# Altium PCB PCB_esp32-current-monitor_2025-10-18.pcbdoc
Units mil, origin at the board's own origin, x right, y up, seen from the top; angles counter-clockwise.
Board outline 3844.64 x 2973.32 mil, 2 copper layers (Top Layer, Bottom Layer); 25 components, 13 nets, 97 pads, 6 vias.
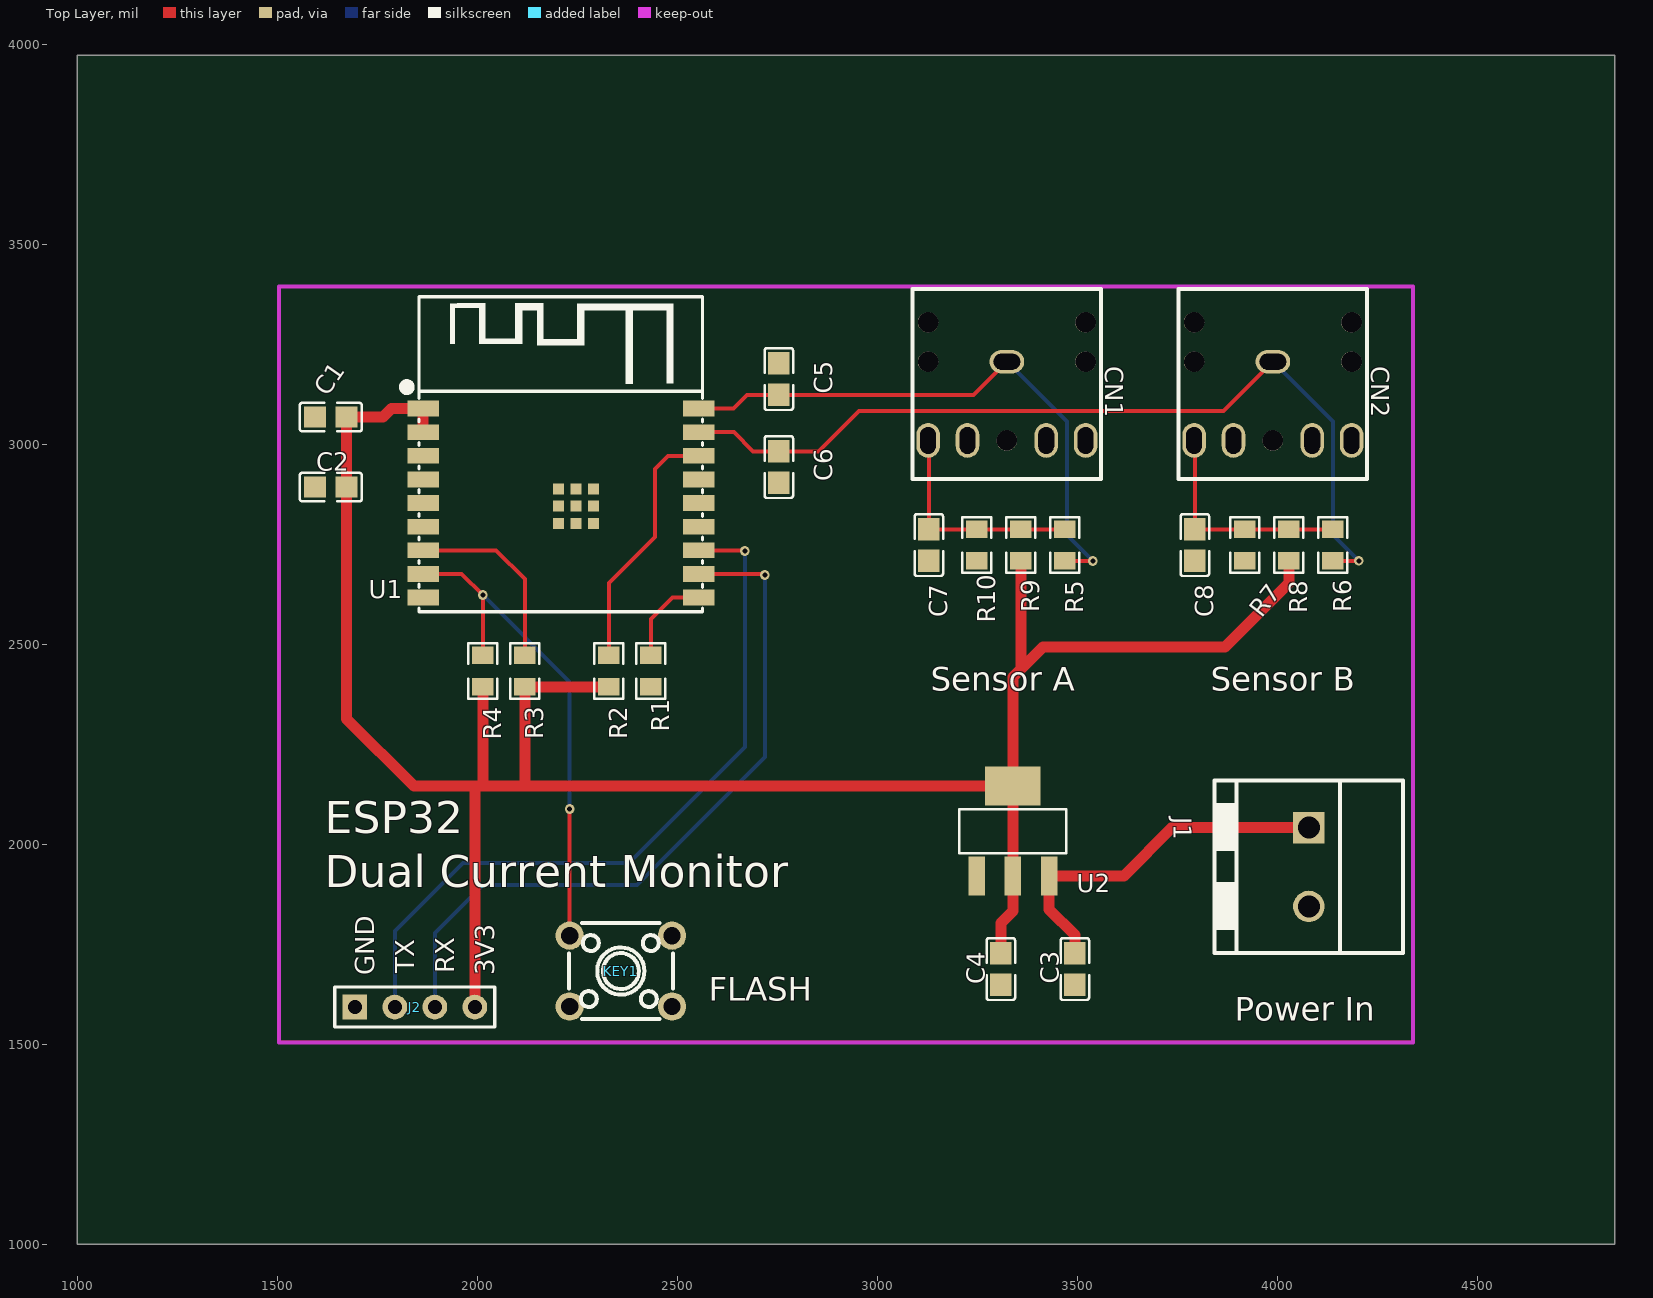
[diagram p0: Top Layer view]
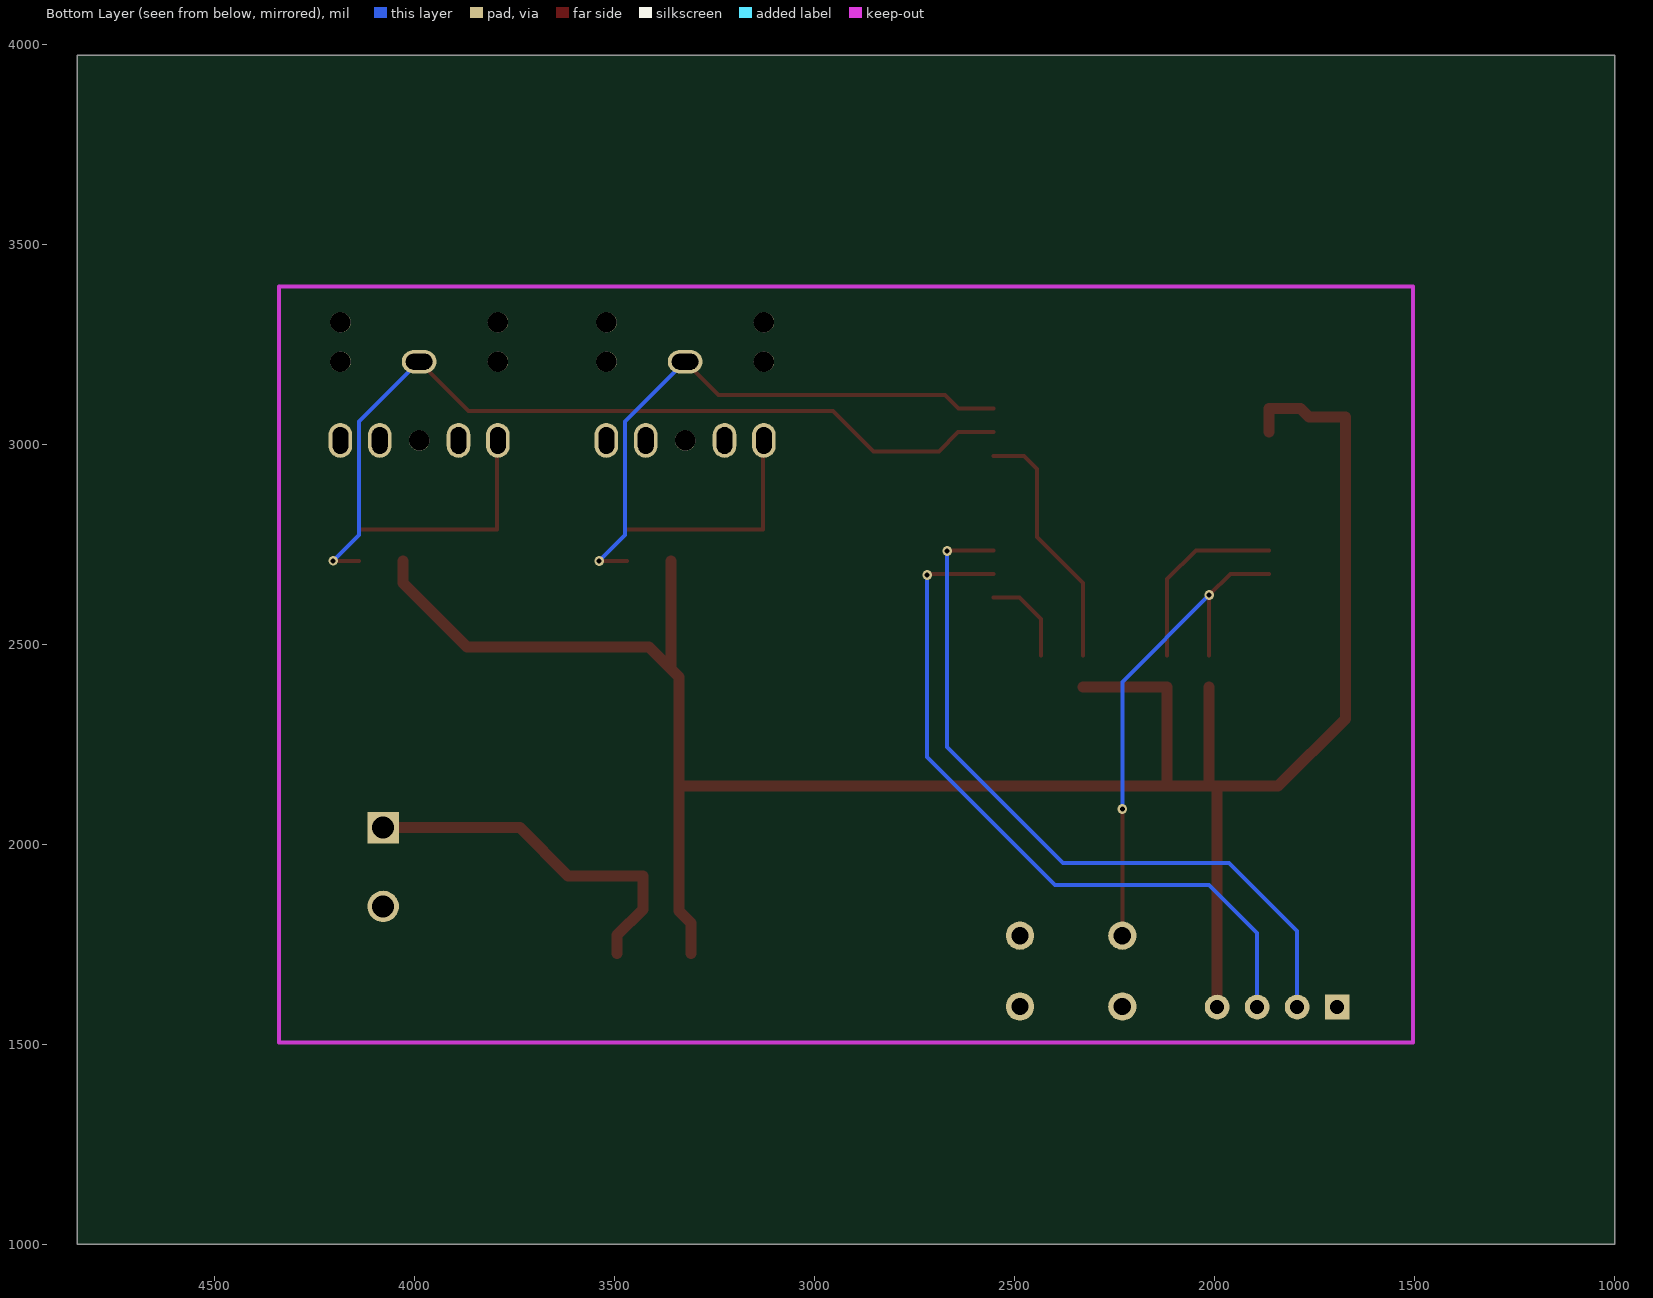
[diagram p1: Bottom Layer view, seen from below]

## Layer stack, top to bottom
Top Layer: signal copper (thickness not stored)
Dielectric: dielectric 12.6, FR-4, Dk 4.8
Bottom Layer: signal copper (thickness not stored)

## Board outline
4844.64,1000 1000,1000 1000,3973.32 4844.64,3973.32

## Components (designator, comment, footprint, x,y, rotation, side; value= is the part's Value field where it differs from the comment)
C1 "0.1u" C0805 1634.41,3068.31 r0 top
C2 "10u" C0805 1634.41,2893.31 r0 top
C3 "10u" C0805 3494.41,1688.31 r90 top
C4 "10u" C0805 3309.41,1688.31 r90 top
C5 "100n" C0805 2754.41,3163.31 r270 top
C6 "100n" C0805 2754.41,2943.31 r90 top
C7 "10u" C0805 3129.41,2748.31 r90 top
C8 "10u" C0805 3794.41,2748.31 r90 top
CN1 "PJ-307G5" AUDIO-TH_PJ-307G5 3324.41,3108.31 r270 top
CN2 "PJ-307G5" AUDIO-TH_PJ-307G5 3989.41,3108.31 r270 top
J1 "KF127S-5.0-2P" CONN-TH_2P-P5.00_KEFA_KF127S-5.0-2P 4079.41,1943.31 r270 top
J2 "HDR-M-2.54_1x4" HDR-M-2.54_1X4 1844.41,1593.31 r0 top
KEY1 "K4-6×6_TH" KEY-TH_4P-L6.0-W6.0-P4.50-LS6.5 2359.41,1683.31 r0 top
R1 "10k" R0805 2434.41,2433.31 r90 top
R2 "10k" R0805 2329.41,2433.31 r270 top
R3 "10k" R0805 2119.41,2433.31 r270 top
R4 "10k" R0805 2014.41,2433.31 r270 top
R5 "1k" R0805 3469.41,2748.31 r270 top
R6 "1k" R0805 4139.41,2748.31 r270 top
R7 "10k" R0805 3919.41,2748.31 r90 top
R8 "10k" R0805 4029.41,2748.31 r270 top
R9 "10k" R0805 3359.41,2748.31 r270 top
R10 "10k" R0805 3249.41,2748.31 r90 top
U1 "ESP32-C3-WROOM-02-H4" WIFIM-SMD_18P-L20.0-W18.0-P1.50 2209.41,2853.31 r0 top
U2 "AMS1117-3.3/TR" SOT-223_L6.5-W3.5-P2.30-LS7.0-BR 3339.41,2033.31 r270 top

## Footprints (in the part's own frame and the unit in brackets; to place one, negate y for a bottom-side part, rotate by r counter-clockwise, add the part's x,y. Pads: shape width x height; smd on the part's side, far side on the other; paste and mask are expansions set on the pad)
AUDIO-TH_PJ-307G5 [mm]
  oval 1.5x2.2 hole 1 slot 1.7 at 90 deg paste+0 mask+0.051: 1(-2.5,0)
  oval 2.2x1.5 hole 1 slot 1.7 at 0 deg paste+0 mask+0.051: 2(2.5,-5) 3(2.5,5) 4(2.5,-2.5) 5(2.5,2.5)
  round 1.3 hole 1.3 unplated paste+0: ""(-5,5) ""(-5,-5) ""(-2.5,5) ""(-2.5,-5) ""(2.5,0)
  silkscreen extent -7.11,-5.99 4.95,5.99
C0805 [mm]
  rect 1.41x1.35 smd paste-100 mask+0.051: 1(-1,0) 2(1,0)
  silkscreen extent -1.96,-0.9 1.96,0.9
CONN-TH_2P-P5.00_KEFA_KF127S-5.0-2P [mm]
  rect 2x2 hole 1.4 paste+0 mask+0.05: 1(-2.5,0)
  round 2 hole 1.4 paste+0 mask+0.05: 2(2.5,0)
  silkscreen extent -5.5,-6 5.46,5.97
HDR-M-2.54_1X4 [mil]
  rect 62x62 hole 35 paste+0 mask+2: 1(-150,0)
  round 62 hole 35 paste+0 mask+2: 2(-50,0) 3(50,0) 4(150,0)
  silkscreen extent -200,-50 200,50
KEY-TH_4P-L6.0-W6.0-P4.50-LS6.5 [mm]
  round 1.8 hole 1.1 paste+0 mask+0.051: 1(-3.251,-2.25) 2(3.251,-2.25) 3(3.251,2.25) 4(-3.251,2.25)
  silkscreen extent -3.3,-3.05 3.3,3.05
R0805 [mil]
  rect 44.59x54.21 smd paste-3937.01 mask+2: 1(-39.37,0) 2(39.37,0)
  silkscreen extent -69,-36 69,36
SOT-223_L6.5-W3.5-P2.30-LS7.0-BR [mm]
  rect 2.465x1.05 smd paste+0 mask+0.051: 1(2.858,-2.3) 2(2.857,0) 3(2.857,2.3)
  rect 2.465x3.54 smd paste+0 mask+0.051: 4(-2.857,0)
  silkscreen extent -1.4,-3.4 1.4,3.4
WIFIM-SMD_18P-L20.0-W18.0-P1.50 [mm]
  rect 2x1 smd paste+0 mask+0.05: 1(-8.75,6) 2(-8.75,4.5) 3(-8.75,3) 4(-8.75,1.5) 5(-8.75,0) 6(-8.75,-1.5) 7(-8.75,-3) 8(-8.75,-4.5) 9(-8.75,-6) 10(8.75,-6) 11(8.75,-4.5) 12(8.75,-3) 13(8.75,-1.5) 14(8.75,0) 15(8.75,1.5) 16(8.75,3) 17(8.75,4.5) 18(8.75,6)
  rect 0.7x0.7 smd paste+0 mask+0.05: 19(-0.14,-1.3) 19(-0.14,-0.2) 19(-0.14,0.9) 19(0.96,-1.3) 19(0.96,-0.2) 19(0.96,0.9) 19(2.06,-1.3) 19(2.06,-0.2) 19(2.06,0.9)
  silkscreen extent -10.03,-6.9 9,13.1

## Via types
v1: diameter 24.41, hole 12.2, Top Layer to Bottom Layer, tented both sides, 6 vias

## Nets (pads, with @x,y where several pads share a name; then routed paths per layer and width w, separated by ;. In a path a pad name is that pad's centre, name@x,y a point inside that pad or via, vN(x,y) a via of type N, cw(c..) or ccw(c..) an arc to the next point about the centre after c; other vN are vias at no path point)
+5V: C3.2 J1.1 U2.3 | length 919.4
  Top Layer w27.56: C3.2 3494.41,1773.31 3429.96,1837.76 U2.3 3616.91,1920.81 3737.84,2041.73 J1.1
CN1_2: C7.2 CN1.2 R5.1 R9.1 R10.2 | length 563
  Top Layer w10: CN1.2 3129.41,3008.03 C7.2 R10.2 R9.1 R5.1
CN2_2: C8.2 CN2.2 R6.1 R7.2 R8.1 | length 568
  Top Layer w10: CN2.2 3794.41,3008.03 C8.2 R7.2 R8.1 R6.1
GND: C1.1 C2.1 C3.1 C4.1 C5.1 C6.1 C7.1 C8.1 J1.2 J2.1 KEY1.3 R1.1 R7.1 R10.1 U1.9 U1.19 U2.1
SENS1_L: C5.2 CN1.1 R5.2 U1.18 | length 1476.5
  Top Layer w10: U1.18 2640.63,3089.53 2675.04,3123.94 C5.2 3241.61,3123.94 CN1.1 ; R5.2 v1(3539.41,2708.31)
  Bottom Layer w10: CN1.1 3474.41,3056.74 3474.41,2773.31 v1(3539.41,2708.31)
SENS2_L: C6.2 CN2.1 R6.2 U1.17 | length 2200
  Top Layer w10: U1.17 2642.24,3030.48 2690.04,2982.68 C6.2 2853.78,2982.68 2954.41,3083.31 3865.99,3083.31 CN2.1 ; R6.2 v1(4204.41,2708.94)
  Bottom Layer w10: CN2.1 4139.41,3056.71 4139.41,2773.91 v1(4204.41,2708.94)
U1_7: R3.1 U1.7 | length 474.9
  Top Layer w10: U1.7 2047.52,2735.2 2119.41,2663.31 R3.1
U1_8: KEY1.4 R4.1 U1.8 | length 1263.3
  Top Layer w10: U1.8@1864.92,2676.15 1961.57,2676.15 v1(2014.41,2623.31) R4.1 ; KEY1.4 v1(2231.41,2088.31)
  Bottom Layer w10: v1(2014.41,2623.31) 2231.41,2406.31 v1(2231.41,2088.31)
U1_10: R1.2 U1.10 | length 232.4
  Top Layer w10: R1.2 2434.41,2563.31 2488.19,2617.09 U1.10
U1_11: J2.3 U1.11 | length 1813.9
  Top Layer w10: U1.11 2716.57,2676.15 v1(2719.41,2673.31)
  Bottom Layer w10: J2.3 1894.41,1778.31 2014.41,1898.31 2399.41,1898.31 2719.41,2218.31 v1(2719.41,2673.31)
U1_12: J2.2 U1.12 | length 1861.8
  Top Layer w10: U1.12 2667.52,2735.2 v1(2669.41,2733.31)
  Bottom Layer w10: J2.2 1794.41,1783.31 1964.41,1953.31 2379.41,1953.31 2669.41,2243.31 v1(2669.41,2733.31)
U1_16: R2.1 U1.16 | length 636.5
  Top Layer w10: R2.1 2329.41,2653.31 2444.41,2768.31 2444.41,2938.31 2477.52,2971.42 U1.16
VCC: C1.2 C2.2 C4.2 J2.4 R2.2 R3.2 R4.2 R8.2 R9.2 U1.1 U1.2 U2.2 U2.4 | length 5820.8
  Top Layer w27.56: U1.2 U1.1 ; U1.1 1785.61,3089.51 1764.41,3068.31 C1.2 C2.2 1673.78,2313.94 1841.91,2145.81 U2.4 ; J2.4 1994.41,2145.81 ; 2014.41,2145.81 R4.2 ; 2119.41,2145.81 R3.2 R2.2 ; C4.2 3309.41,1803.31 3339.41,1833.31 U2.2 U2.4 ; 3359.41,2441.46 R9.2 ; R8.2 4029.41,2653.31 3869.41,2493.31 3414.41,2493.31 3339.41,2418.31 U2.4
pads on no net: CN1. CN1.3 CN1.4 CN1.5 CN2. CN2.3 CN2.4 CN2.5 KEY1.1 KEY1.2 U1.3 U1.4 U1.5 U1.6 U1.13 U1.14 U1.15

## Polygon pours and split planes (outlines as drawn)
GND on Bottom Layer (solid): 1504.41,3393.31 4334.41,3393.31 4339.41,3398.31 4339.41,1508.31 1504.41,1508.31
GND on Top Layer (solid): 1504.41,3393.31 4334.41,3393.31 4339.41,3398.31 4339.41,1508.31 1504.41,1508.31

## Other copper
Top Layer:
  pour cut-out net SENS1_L: 1844.41,3403.31 2574.41,3403.31 2574.41,3118.31 1844.41,3118.31
Bottom Layer:
  pour cut-out net SENS1_L: 1844.41,3403.31 2574.41,3403.31 2574.41,3118.31 1844.41,3118.31

## Silkscreen, mask and mechanical layers (free items; w line width, h text height)
Top Overlay:
  text "Sensor A" at 3134.41,2383.78 h59.05
  text "Sensor B" at 3834.41,2383.78 h59.05
  text "ESP32" at 1619.41,2028.31 h80
  text "Dual Current Monitor" at 1619.41,1893.31 h80
  text "TX" at 1843.03,1678.31 h47.24 r90
  text "RX" at 1943.03,1678.31 h47.24 r90
  text "GND" at 1743.03,1673.31 h47.24 r90
  text "3V3" at 2043.03,1673.31 h47.24 r90
  text "FLASH" at 2579.41,1608.78 h59.05
  text "Power In" at 3894.41,1558.78 h59.05